# EAGLE board mcb (EAGLE 7.1.0)
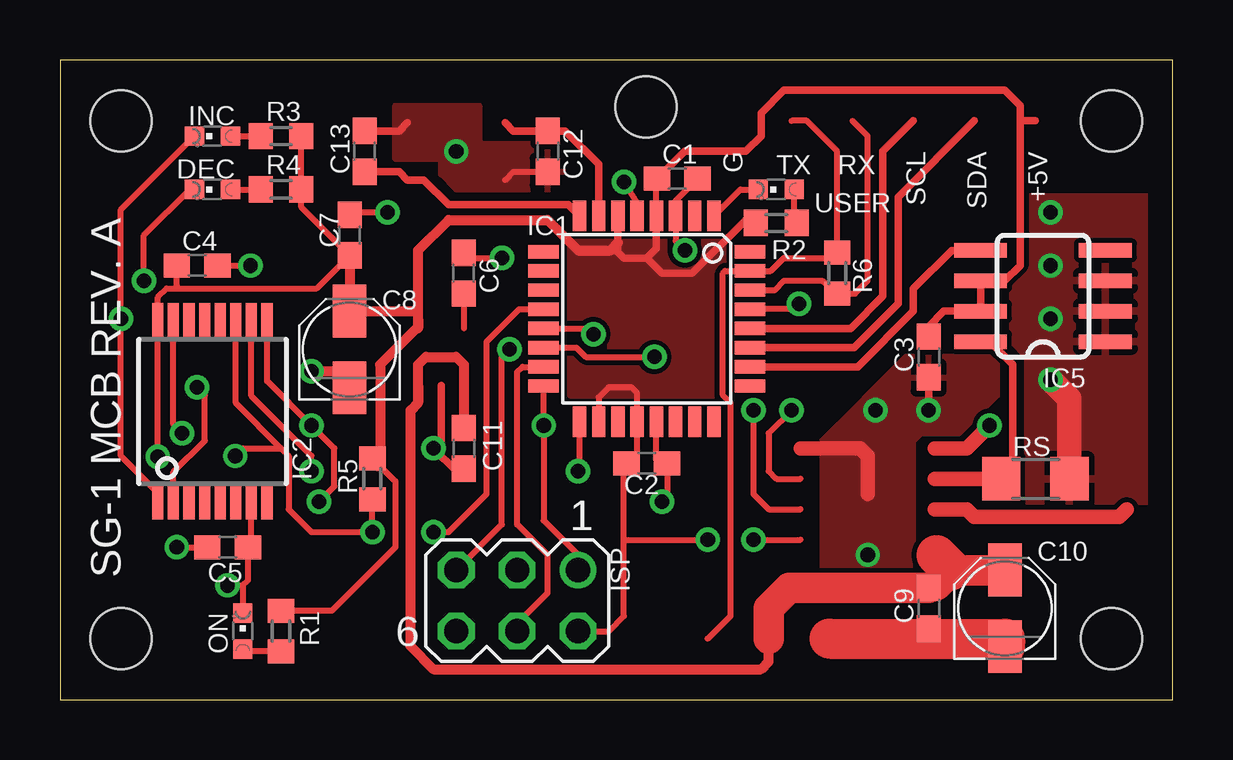
[diagram p0: board, top side]
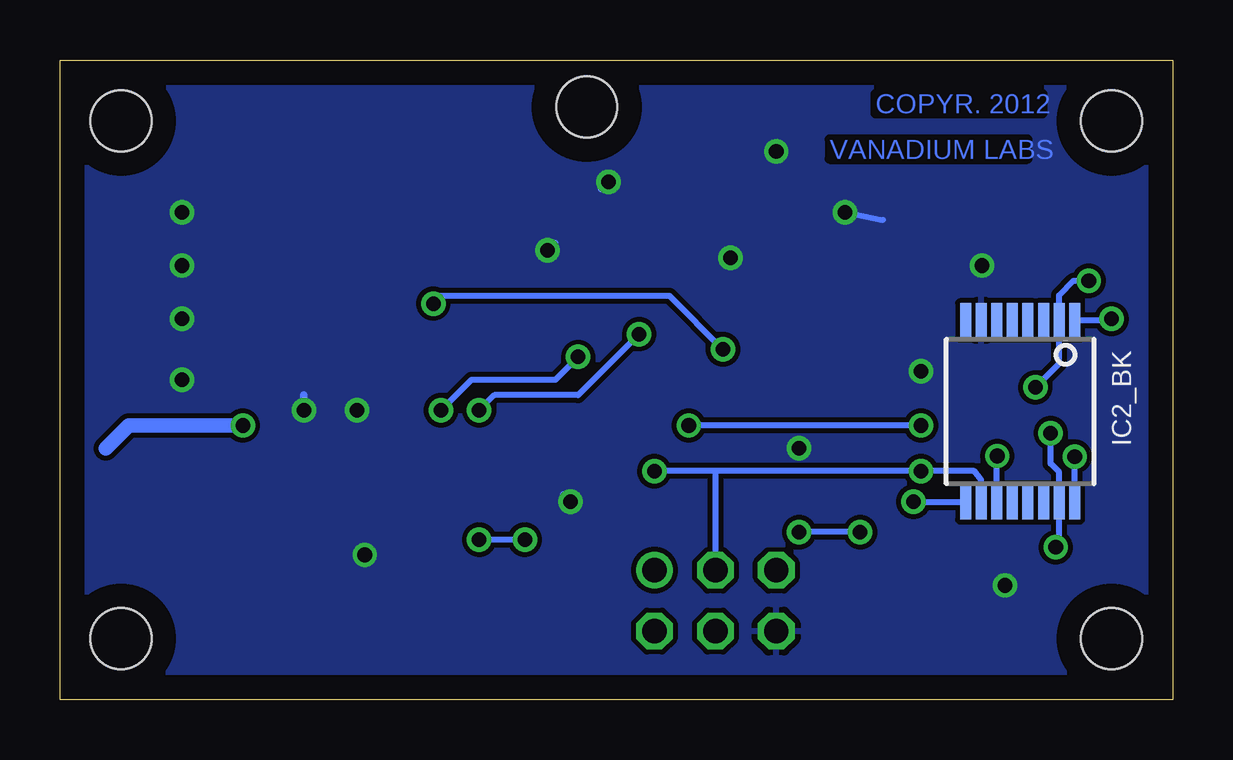
[diagram p1: board, bottom side, seen from below]

Size 46.35 x 26.67 mm. Coordinates in mm from the lower left corner, seen from the top.
Outline: 0,0 46.35,0 46.35,26.67 0,26.67 0,0
Copper layers (1*16): Top 0.035mm / dielectric 1.5mm / Bottom 0.035mm
Design rules "default *": minimum track width 10mil, minimum drill 24mil, track to track 8mil, track to pad 8mil, pad to pad 8mil, via to via 8mil, smd to smd 8mil, copper to edge 40mil, drill to drill 8mil, minimum pad ring 10mil, minimum via ring 8mil, stop-mask expansion 4mil, vias tented up to drill 24mil, thermal gap 10mil
Holes 2.54 mm at 2.54,24.13 2.54,2.54 24.41,24.71 43.81,24.13 43.81,2.54

## Footprints (pad centres in the part's own frame; a part is rotated, then mirrored left to right if it is on the bottom)
C0603 = smd 1.1 x 1: 1 -0.85,0; 2 0.85,0
PANASONIC_B = smd 2.2 x 1.4: + 1.6,0; - -1.6,0
CHIPLED_0603 = smd 0.8 x 0.8: A 0,-0.75; C 0,0.75
TQFP32-08 = smd 1.27 x 0.559: 1 -4.293,2.8; 2 -4.293,2; 3 -4.293,1.2; 4 -4.293,0.4; 5 -4.293,-0.4; 6 -4.293,-1.2; 7 -4.293,-2; 8 -4.293,-2.8; 17 4.293,-2.8; 18 4.293,-2; 19 4.293,-1.2; 20 4.293,-0.4; 21 4.293,0.4; 22 4.293,1.2; 23 4.293,2; 24 4.293,2.8 | smd 0.559 x 1.27: 9 -2.8,-4.293; 10 -2,-4.293; 11 -1.2,-4.293; 12 -0.4,-4.293; 13 0.4,-4.293; 14 1.2,-4.293; 15 2,-4.293; 16 2.8,-4.293; 25 2.8,4.293; 26 2,4.293; 27 1.2,4.293; 28 0.4,4.293; 29 -0.4,4.293; 30 -1.2,4.293; 31 -2,4.293; 32 -2.8,4.293
SSOP16 = smd 0.46 x 1.43: 1 -2.275,-3.795; 2 -1.625,-3.795; 3 -0.975,-3.795; 4 -0.325,-3.795; 5 0.325,-3.795; 6 0.975,-3.795; 7 1.625,-3.795; 8 2.275,-3.795; 9 2.275,3.795; 10 1.625,3.795; 11 0.975,3.795; 12 0.325,3.795; 13 -0.325,3.795; 14 -0.975,3.795; 15 -1.625,3.795; 16 -2.275,3.795
SO8 = smd 0.6 x 2.2: 1 -1.905,-2.6; 2 -0.635,-2.6; 3 0.635,-2.6; 4 1.905,-2.6; 5 1.905,2.6; 6 0.635,2.6; 7 -0.635,2.6; 8 -1.905,2.6
MA03-2 = drill 1.016: 1 -2.54,-1.27 | drill 1.016 octagon: 2 -2.54,1.27; 3 0,-1.27; 4 0,1.27; 5 2.54,-1.27; 6 2.54,1.27
R0603 = smd 1 x 1.1: 1 -0.85,0; 2 0.85,0
R1206 = smd 1.6 x 1.803: 1 -1.422,0; 2 1.422,0

## Placement (x,y rotation side)
C1  0.1uF  [C0603]  25.72,21.72 0 top
C2  0.1uF  [C0603]  24.45,9.84 0 top
C3  0.1uF  [C0603]  36.2,14.29 270 top
C4  0.1uF  [C0603]  5.71,18.1 0 top
C5  0.1uF  [C0603]  6.99,6.35 0 top
C6  470pF  [C0603]  16.83,17.78 90 top
C7  2.2uF  [C0603]  12.06,19.37 90 top
C8  10uF  [PANASONIC_B]  12.06,14.61 90 top
C9  0.22uF  [C0603]  36.2,3.81 270 top
C10  100uF  [PANASONIC_B]  39.37,3.81 90 top
C11  1uF  [C0603]  16.83,10.48 270 top
C12  22pf  [C0603]  20.32,22.86 270 top
C13  22pf  [C0603]  12.7,22.86 90 top
DEC  [CHIPLED_0603]  6.35,21.27 90 top
IC1  MEGA168  [TQFP32-08]  24.45,15.88 270 top
IC2  AS5045  [SSOP16]  6.35,12.01 0 top
IC2_BK  AS5045  [SSOP16]  6.35,12.01 180 bottom
IC3  MIC5205-5.0  [SOT-23-5]  15.88,14.29 0 top
IC4  A4952  [SOIC8TP]  33.66,8.57 0 top
IC5  AD8205R  [SO8]  40.96,16.83 90 top
INC  [CHIPLED_0603]  6.35,23.5 90 top
ISP  [MA03-2]  19.05,4.13 180 top
MOT  JUMPER  [2-PIN]  44.45,9.21 270 top
ON  [CHIPLED_0603]  7.62,2.86 0 top
Q1  16MHZ  [4LCC]  16.51,22.86 0 top
R1  1K  [R0603]  9.21,2.86 90 top
R2  1K  [R0603]  29.84,19.88 180 top
R3  1K  [R0603]  9.21,23.5 0 top
R4  1K  [R0603]  9.21,21.27 0 top
R5  20K  [R0603]  13.02,9.21 90 top
R6  0  [R0603]  32.38,17.78 90 top
RS  [R1206]  40.64,9.21 180 top
U$2  HEADER6  [1X6]  40.64,24.13 180 top
U$5  AX-12  [WM18887-ND]  32.07,2.54 0 top
USER  [CHIPLED_0603]  29.84,21.27 90 top

## Library data of the parts
C1-C13 R1-R6 RS = rcl
DEC INC ON USER = led
IC1 = atmel
IC2 IC2_BK = austriamicrosystems
IC3-IC5 MOT Q1 U$2 U$5 = robots
ISP = con-lstb

## Nets
3V3: C5.1 IC2.15 IC2_BK.15
+5V: C1.1 C2.1 C3.1 C4.1 C7.1 C8.+ IC1.4 IC1.6 IC1.18 IC1.20 IC2.16 IC2_BK.16 IC3.5 IC4.4 IC5.6 IC5.7 ISP.2 R1.2 R2.2 R3.2 R4.2 R5.2 U$2.P$1
+12V: C9.1 C10.+ C11.1 IC3.1 IC3.3 IC4.5 U$5.2
AS_CS: IC1.12 IC2.11 IC2_BK.11 R5.1
GND: C1.2 C2.2 C3.2 C4.2 C5.2 C6.2 C7.2 C8.- C9.2 C10.- C11.2 C12.2 C13.2 IC1.3 IC1.5 IC1.21 IC2.7 IC2_BK.7 IC3.2 IC4.1 IC4.PAD IC5.1 IC5.2 IC5.3 ISP.6 ON.C Q1.2 Q1.4 RS.1 U$2.P$6 U$5.1
MISO: IC1.16 IC2.9 IC2_BK.9 ISP.1
MOSI: IC1.15 ISP.4
N$1: IC4.6 MOT.P$2
N$2: IC4.8 MOT.P$1
N$3: IC4.7 IC5.8 RS.2
N$4: IC1.1 USER.C
N$5: IC2.1 IC2_BK.1 INC.C
N$6: DEC.C IC2.2 IC2_BK.2
N$7: INC.A R3.1
N$8: DEC.A R4.1
N$9: C12.1 IC1.7 Q1.3
N$10: C13.1 IC1.8 Q1.1
N$12: IC1.14 IC4.2
N$13: ON.A R1.1
N$14: R2.1 USER.A
N$15: IC1.13 IC4.3
N$20: C6.1 IC3.4
RESET: IC1.29 ISP.5
RX: IC1.30 R6.1 U$2.P$4
SCK: IC1.17 IC2.10 IC2_BK.10 ISP.3
SCL: IC1.28 U$2.P$3
SDA: IC1.27 U$2.P$2
SENSE: IC1.26 IC5.5
TX: IC1.31 R6.2 U$2.P$5 U$5.3

## Tracks (layer width: path | path; a pad name or v marks a point on that pad's centre or on a via)
3V3  (via drill 0.61)
  Top 0.254: v4.87,6.35 C5.1 | IC2.15 4.72,11.47 v5.08,11.11
  Bottom 0.254: v4.87,6.35 4.72,6.49 IC2_BK.15 4.72,9.49 5.08,9.84 v5.08,11.11
+5V  (via drill 0.61)
  Top 0.254: IC1.18 22.45,12.61 22.86,13.02 23.81,13.02 24.05,12.78 IC1.20 24.05,9.97 C2.1 23.5,9.74 23.5,6.67 | 28.57,20 R2.2 | 24.87,21.69 C1.1 24.85,21.25 IC1.4 | R3.2 R4.2 10.06,20.52 C7.1 10.69,17.14 4.76,17.14 | 4.76,17.14 4.45,17.14 4.08,16.77 IC2.16 v4.08,10.13 | C4.1 4.87,17.25 4.76,17.14 | ISP.2 22.86,2.86 23.5,3.49 23.5,6.67 | v28.89,6.67 30.86,6.67 | 23.5,6.67 v26.99,6.67 | R1.2 11.33,3.71 13.97,6.35 13.97,9.11 R5.2
  Top 0.305: IC1.6 23.25,19.05 23.25,18.66 23.5,18.41 24.45,18.41 | IC1.4 24.85,18.82 24.45,18.41 | 40.01,24.13 40.64,24.13 | 40.01,24.13 40.01,18.1 39.37,17.46 IC5.6 IC5.7 36.83,16.19 36.2,15.56 C3.1 | 28.57,20 26.35,17.78 25.08,17.78 24.45,18.41 | 24.87,21.69 26.04,22.86 28.57,22.86 29.21,23.5 29.21,24.45 30.16,25.4 39.37,25.4 40.01,24.77 40.01,24.13
  Top 0.406: 14.93,15.56 14.93,18.73 16.19,20 20.32,20 21.59,18.73 22.93,18.73 23.25,19.05 | 14.93,15.56 14.91,16.2 C8.+ C7.1 | 14.93,15.56 14.93,15.49 | 14.93,15.56 13.34,13.97 13.34,9.84 13.23,9.74 R5.2
  Bottom 0.254: IC2_BK.16 v4.08,10.13 | v26.99,6.67 v28.89,6.67
  pour Top: 21.27,19.05 27.62,19.05 27.62,12.7 21.27,12.7
+12V
  Top 0.254: 16.83,13.09 16.82,13.09
  Top 0.305: 36.51,6.03 36.51,6.61 36.45,6.67 | 14.93,13.09 14.92,12.46 14.92,12.38
  Top 0.406: 16.83,12.46 C11.1 16.73,11.11 | 29.53,3.81 29.53,1.59 29.21,1.27 15.56,1.27 14.61,2.22 14.61,12.06 14.92,12.38 | 14.92,12.77 14.93,13.09 14.93,12.38 | 16.83,12.46 16.83,13.09 16.83,13.97 16.51,14.29 15.24,14.29 14.92,13.97 14.92,12.77 | 16.82,13.09 16.83,12.46 | 14.92,12.46 14.92,12.77
  Top 1.27: 29.53,2.54 29.53,3.81 30.38,4.66 C9.1 36.51,4.76 37.15,5.4 39.36,5.4 C10.+
  Top 1.676: 37.15,5.4 36.51,6.03
AS_CS  (via drill 0.61)
  Top 0.254: IC1.12 19.13,16.27 17.78,14.92 17.78,8.57 16.19,6.99 v15.56,6.99 | IC2.11 7.33,12.36 9.21,10.48 | v7.3,10.16 7.62,10.48 9.21,10.48 | 9.21,10.48 9.53,10.16 9.53,7.94 10.48,6.99 v13.02,6.99 R5.1
  Bottom 0.254: IC2_BK.11 7.33,9.82 v7.3,10.16 | v13.02,6.99 v15.56,6.99
GND  (via drill 0.61)
  Top 0.254: IC1.21 24.85,9.97 C2.2 25.3,8.47 v25.08,8.26 | v26.04,18.73 25.65,19.12 IC1.3 25.65,20.8 C1.2 | C6.2 16.83,18.41 v18.41,18.41 | C4.2 v7.94,18.1 | 7.62,4.76 ON.C | 7.62,4.76 7.83,4.98 C5.2 7.97,6.49 IC2.7 | C12.2 18.89,22.01 18.54,21.67 | IC1.5 24.05,20.72 v23.5,21.59 | v6.99,4.76 7.62,4.76 | v13.65,20.32 12.17,20.32 C7.2
  Top 0.305: 36.2,2.54 C9.2 | C13.2 14.13,23.71 14.48,24.05 | v36.2,12.06 C3.2 | 16.83,9.53 16.51,9.53 v15.56,10.48 15.88,10.79 15.88,13.09
  Top 0.406: C11.2 16.83,9.53 | v10.48,13.69 11.7,13.69 C8.-
  Top 0.61: 30.86,10.48 33.34,10.48 33.66,10.16 33.66,8.57
  Top 1.016: RS.1 42.06,12.55 v41.27,13.34
  Top 1.676: 32.07,2.54 36.2,2.54 39.38,2.54 C10.-
  Bottom 0.254: v25.08,8.26 25.4,8.57 | v26.04,18.73 25.72,19.05 | v23.5,21.59 23.81,21.27 | v13.65,20.32 12.06,20 | v7.94,18.1 7.62,18.1 | v6.99,4.76 6.67,4.76
  Bottom 0.305: v36.2,12.06 36.2,12.7
  other vias: 41.27,20.32 41.27,18.1 41.27,15.88 33.97,12.06 33.66,6.03 16.51,22.86
  pour Bottom: 0.95,26.04 45.4,26.04 45.4,0.64 0.95,0.64
  pour Top: 39.69,14.92 39.69,17.14 40.32,17.78 40.32,20.95 45.4,20.95 45.4,8.26 40.32,8.26 40.32,14.29
  pour Top: 31.75,10.79 31.75,5.4 35.56,5.4 35.56,10.79 35.88,11.11 37.47,11.11 39.05,12.7 39.05,13.97 38.73,14.29 35.24,14.29
  pour Top: 15.24,24.77 17.46,24.77 17.46,23.18 20.95,23.18 20.95,21.27 16.51,21.27 15.88,21.91 15.88,22.54 13.97,22.54 13.97,24.77
MISO  (via drill 0.61)
  Top 0.254: IC2.9 8.62,13.28 v10.48,11.43 11.43,10.48 11.43,8.89 v10.79,8.26 | ISP.1 21.59,6.03 20.16,7.47 v20.16,11.43 IC1.16
  Bottom 0.254: v10.48,11.43 v20.16,11.43 | IC2_BK.9 10.51,8.22 v10.79,8.26
MOSI
  Top 0.254: IC1.15 19.27,13.88 19.05,13.65 19.05,7.3 20.32,6.03 20.32,4.45 19.05,3.17 ISP.4
N$1
  Top 0.61: 36.45,7.94 37.78,7.94 38.1,7.62 44.13,7.62 44.45,7.94
N$2  (via drill 0.61)
  Top 0.61: 36.45,10.48 37.78,10.48 v38.73,11.43
  Bottom 0.61: v38.73,11.43 43.5,11.43 44.45,10.48
N$3
  Top 0.305: IC5.8 38.73,14.92 39.69,13.97 39.69,9.68 RS.2
  Top 0.61: 36.45,9.21 RS.2
N$4
  Top 0.254: USER.C 28.35,21.27 IC1.1
N$5  (via drill 0.61)
  Top 0.254: INC.C 2.54,20.43 v2.54,15.88 2.54,10.16 4.08,8.62 IC2.1
  Bottom 0.254: IC2_BK.1 2.61,15.81 v2.54,15.88
N$6  (via drill 0.61)
  Top 0.254: DEC.C 5.4,21.27 3.49,19.37 v3.49,17.46 | v5.71,13.02 6.03,12.7 6.03,10.79 4.72,9.49 IC2.2
  Bottom 0.254: v3.49,17.46 4.13,17.46 4.72,16.86 IC2_BK.2 4.72,14.01 v5.71,13.02
N$7
  Top 0.254: INC.A R3.1
N$8
  Top 0.254: DEC.A R4.1
N$9
  Top 0.305: IC1.7 22.45,22.32 21.06,23.71 C12.1 18.89,23.71 18.54,24.05
N$10
  Top 0.305: IC1.8 21.18,20.64 16.19,20.64 15.16,21.67 14.48,21.67 14.13,22.01 C13.1
N$12  (via drill 0.61)
  Top 0.254: v30.48,12.06 29.53,11.11 29.53,9.53 29.84,9.21 30.86,9.21 | v24.77,14.29 21.91,14.29 21.52,14.68 IC1.14
  Bottom 0.254: v24.77,14.29 25.72,13.34 29.21,13.34 v30.48,12.06
N$13
  Top 0.254: R1.1 7.72,2.01 ON.A
N$14
  Top 0.254: USER.A 30.59,20.42 R2.1
N$15  (via drill 0.61)
  Top 0.254: v28.89,12.06 28.89,8.57 29.53,7.94 30.86,7.94 | IC1.13 21.99,15.47 v22.23,15.24
  Bottom 0.254: v22.23,15.24 24.77,12.7 28.26,12.7 v28.89,12.06
N$20
  Top 0.254: 16.82,15.49 16.82,15.97 C6.1
RESET  (via drill 0.61)
  Top 0.254: ISP.5 18.41,7.3 18.41,14.29 v18.73,14.61 | IC1.29 30.56,16.27 v30.8,16.51
  Bottom 0.254: v18.73,14.61 20.95,16.83 30.48,16.83 v30.8,16.51
RX
  Top 0.254: IC1.30 29.77,17.07 30.16,17.46 31.75,17.46 32.28,17.04 R6.1 33.12,16.93 33.66,17.46 33.66,23.5 33.02,24.13
SCK  (via drill 0.61)
  Top 0.254: IC2.10 7.97,12.66 10.48,10.16 v10.48,9.53 | IC1.17 21.65,9.58 v21.59,9.53
  Bottom 0.254: IC2_BK.10 7.97,9.17 8.26,9.53 v10.48,9.53 19.05,9.53 | 19.05,9.53 v21.59,9.53 | 19.05,9.53 ISP.3
SCL
  Top 0.305: IC1.28 32.94,15.47 34.29,16.83 34.29,22.86 35.56,24.13
SDA
  Top 0.305: 38.1,24.13 34.92,20.95 34.92,16.51 33.09,14.68 IC1.27
SENSE
  Top 0.305: IC1.26 33.24,13.88 35.56,16.19 35.56,17.14 37.15,18.73 IC5.5
TX
  Top 0.254: 26.99,2.54 27.94,3.49 27.94,12.38 27.62,12.7 27.62,17.78 27.72,17.88 IC1.31 29.62,17.88 30.16,18.41 32.07,18.41 R6.2 32.38,22.86 31.11,24.13 30.48,24.13

## Text on the board
Bottom: COPYR. 2012 | VANADIUM LABS
tNames: G | SCL | SDA | +5V | TX | RX | SG-1 MCB REV. A